# Allegro board LAN9500_TEST_V10A.brd
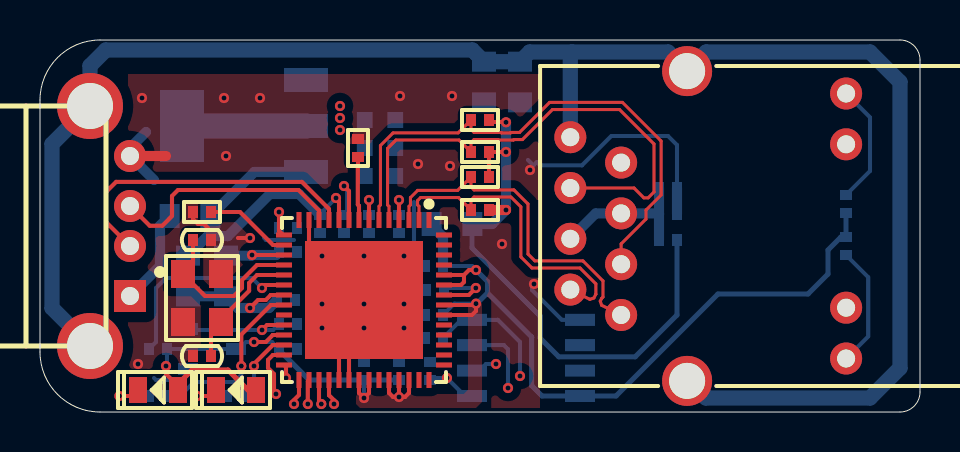
[diagram p0: board, top side]
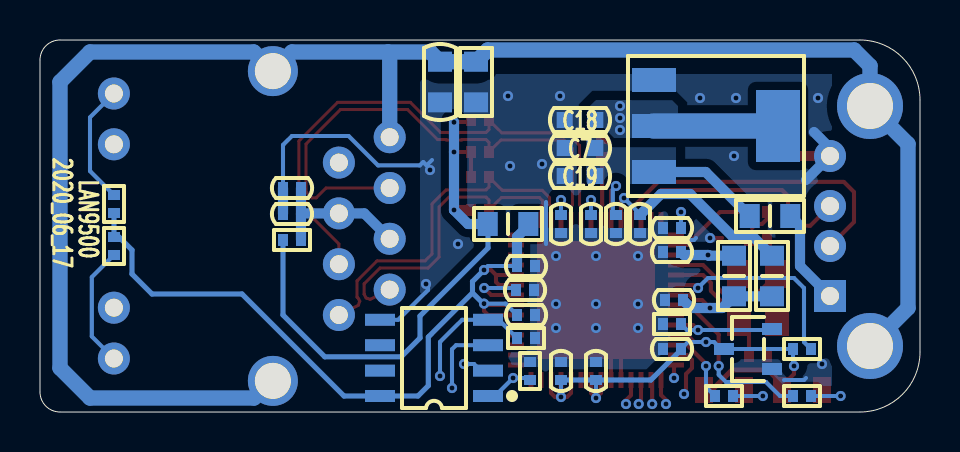
[diagram p1: board, bottom side, seen from below]

Outline 44 x 18.6 mm; copper layers: TOP, L02_GND, L03_VCC, BOTTOM. Coordinates in mm from the lower left corner of the outline.
Outline path: 0,15.6 arc(0.88,17.72) 3,18.6 43,18.6 arc(43.71,18.31) 44,17.6 44,1 arc(43.71,0.29) 43,0 3,0 arc(0.88,0.88) 0,3 0,15.6

## Design rules (mm)
constraint set DEFAULT: min track width 0.203, pair gap 0.203
net group DP1: nets RXN RXP
net group DP2: nets TXN TXP
net group DP3: nets USBDM USBDP

## Placement (name value [footprint] x y rotation side)
C1  0.1uF_50V  [C0402]  31.4 11.2 180 bottom
C2  1nF_50V  [C0402]  31.4 9.9 180 bottom
C4  0.1uF_50V  [C0402]  12.4 3.15 180 bottom
C5  12pF_50V  [C0402]  8.1 8.6 180 top
C6  12pF_50V  [C0402]  8.1 2.8 0 top
C7  10uF_10V  [C0603]  17 13.2 0 bottom
C8  0.1uF_50V  [C0402]  19.75 6.1 0 bottom
C9  0.1uF_50V  [C0402]  12.3 5.6 180 bottom
C10  0.1uF_50V  [C0402]  12.4 8 180 bottom
C11  0.1uF_50V  [C0402]  16.2 2.05 270 bottom
C12  0.1uF_50V  [C0402]  17.95 2.05 270 bottom
C13  0.1uF_50V  [C0402]  19.7 7.3 0 bottom
C14  0.1uF_50V  [C0402]  19.7 4.85 0 bottom
C15  0.1uF_50V  [C0402]  17.95 9.4 90 bottom
C16  0.1uF_50V  [C0402]  16.45 9.4 90 bottom
C17  4.7nF_50V  [C0805]  24 16.5 270 bottom
C18  10uF_10V  [C0603]  17 14.6 0 bottom
C19  10uF_10V  [C0603]  17 11.8 0 bottom
C20  0.1uF_50V  [C0402]  14 9.4 90 bottom
C21  0.1uF_50V  [C0402]  15.2 9.4 90 bottom
C22  0.1uF_50V  [C0402]  12.4 9.2 180 bottom
D1  LED_GREEN  [LED0805]  5.9 1.1 180 top
D2  LED_GREEN  [LED0805]  9.8 1.1 180 top
J1  -  [HR911105A]  35.41 9.3 0 top
J2  -  [USB-A-MALE]  4.7 9.3 180 top
L1  BLM21PG600  [L0805]  7.5 9.8 0 bottom
L2  BLM21PG600  [L0805]  20.6 9.4 0 bottom
L3  BLM21PG600  [L0805]  9.3 6.8 90 bottom
L4  BLM21PG600  [L0805]  7.4 6.8 90 bottom
NOREF  -  []  -0.21 0 0 top
NOREF#2  -  []  0 0 90 top
NOREF#3  -  []  0 0 0 top
R1  49.9R  [R0402]  22 11.75 180 top
R2  49.9R  [R0402]  22 10.1 180 top
R3  49.9R  [R0402]  22 14.6 180 top
R4  49.9R  [R0402]  22 13 180 top
R5  470R  [R0402]  40.3 8.3 90 bottom
R6  0R  [R0402]  31.4 8.6 0 bottom
R8  470R  [R0402]  40.3 10.4 270 bottom
R9  12K  [R0402]  15.9 13.2 270 top
R10  10K/NI  [R0402]  19.7 3.7 180 bottom
R12  100K  [R0402]  12.4 4.4 180 bottom
R13  10K  [R0402]  19.5 2.05 90 bottom
R14  12K  [R0402]  8.1 10 0 top
R15  0R  [R0402]  5.9 3.15 180 bottom
R16  10K  [R0402]  5.9 0.8 0 bottom
R17  10K  [R0402]  9.8 0.8 0 bottom
R18  10M  [R0805]  22.2 16.5 270 bottom
U1  LAN9500AI-ABZJ-TR  [QFN56-8X8X0R5-5R9X5R9]  16.2 5.6 180 top
U2  MAX809SN293D3T1G  [SOT23-3]  8.6 3.15 90 bottom
U3  AT93C46DN-SH-T/NI  [SOIC8]  24.3 2.7 90 bottom
U4  AMS1117-3.3  [SOT223]  10.2 14.3 270 bottom
Y1  X322525MOB4SI  [X-4P-3R2X2R5-SMD]  8.1 5.7 270 top

## Library data of the parts
C1 C2 C4-C22 = CAP NP_2
D1 D2 = LED_4
J1 = CON_RJ45_1X8_F_RA_0
J2 = USB-A-MALE
L1-L4 = IND_BEAD_0805_600OHM_200MA
R1-R6 R8-R10 R12-R18 = R_Generic
U1 = LAN9500AI-ABZJ-TR_0
U2 = MAX809_0
U3 = AT93C46DN-SH-T
U4 = AMS1117-3.3
Y1 = X322525MOB4SI

## Footprints (pads in the part's own frame, mm; a bottom-side part is the same pattern mirrored in y, then rotated)
C0402
  rect 0.5x0.6 smd: 1(-0.45,0) 2(0.45,0)
C0603
  rect 0.8x0.8 smd: 1(-0.762,0) 2(0.762,0)
C0805
  rect 1x1.2 smd: 1(-1.016,0) 2(1.016,0)
HR911105A
  round 1.6 hole 0.9: 1(-6.35,-4.45) 2(-8.89,-3.18) 3(-6.35,-1.91) 4(-8.89,-0.64) 5(-6.35,0.63) 6(-8.89,1.9) 7(-6.35,3.17) 8(-8.89,4.44) 9(4.9,-6.625) 10(4.9,-4.085) 11(4.9,4.085) 12(4.9,6.625)
  round 2.5 hole 1.8: 13(-3.05,-7.745) 14(-3.05,7.745)
L0805
  rect 1x1.2 smd: 1(-1.016,0) 2(1.016,0)
LED0805
  rect 0.9x1.3 smd: 1(-1,0) 2(1,0)
QFN56-8X8X0R5-5R9X5R9
  rect 0.25x0.8 smd: 1(-3.25,-4) 2(-2.75,-4) 3(-2.25,-4) 4(-1.75,-4) 5(-1.25,-4) 6(-0.75,-4) 7(-0.25,-4) 8(0.25,-4) 9(0.75,-4) 10(1.25,-4) 11(1.75,-4) 12(2.25,-4) 13(2.75,-4) 14(3.25,-4) 29(3.25,4) 30(2.75,4) 31(2.25,4) 32(1.75,4) 33(1.25,4) 34(0.75,4) 35(0.25,4) 36(-0.25,4) 37(-0.75,4) 38(-1.25,4) 39(-1.75,4) 40(-2.25,4) 41(-2.75,4) 42(-3.25,4)
  rect 0.8x0.25 smd: 15(4,-3.25) 16(4,-2.75) 17(4,-2.25) 18(4,-1.75) 19(4,-1.25) 20(4,-0.75) 21(4,-0.25) 22(4,0.25) 23(4,0.75) 24(4,1.25) 25(4,1.75) 26(4,2.25) 27(4,2.75) 28(4,3.25) 43(-4,3.25) 44(-4,2.75) 45(-4,2.25) 46(-4,1.75) 47(-4,1.25) 48(-4,0.75) 49(-4,0.25) 50(-4,-0.25) 51(-4,-0.75) 52(-4,-1.25) 53(-4,-1.75) 54(-4,-2.25) 55(-4,-2.75) 56(-4,-3.25)
  rect 5.9x5.9 smd: 57(0,0)
R0402
  rect 0.5x0.6 smd: 1(-0.45,0) 2(0.45,0)
R0805
  rect 1x1.2 smd: 1(-1.016,0) 2(1.016,0)
SOIC8
  rect 0.6x1.5 smd: 1(-1.9,-2.7) 2(-0.63,-2.7) 3(0.64,-2.7) 4(1.91,-2.7) 5(1.91,2.7) 6(0.64,2.7) 7(-0.63,2.7) 8(-1.9,2.7)
SOT23-3
  rect 0.6x1 smd: 1(-1,-1.2) 2(1,-1.2) 3(0,1.2)
SOT223
  rect 1.2x2.2 smd: 1(-2.3,-3.1) 2(0,-3.1) 3(2.3,-3.1)
  rect 3.6x2.2 smd: 4(0,3.1)
USB-A-MALE
  rect 1.6x1.6 hole 0.9: 1(0.2,3.5)
  round 1.6 hole 0.9: 2(0.2,1) 3(0.2,-1) 4(0.2,-3.5)
  round 3.3 hole 2.3: 5(2.2,6) 6(2.2,-6)
X-4P-3R2X2R5-SMD
  rect 1.4x1.2 smd: 1(-1.2,-0.95) 2(1.2,-0.95) 3(1.2,0.95) 4(-1.2,0.95)

## Nets
GND: C1.1 C2.1 C4.1 C5.1 C6.1 C7.2 C8.1 C9.1 C10.1 C11.1 C12.1 C13.1 C14.1 C15.1 C16.1 C17.2 C18.2 C19.2 C20.1 C21.1 C22.1 J2.4 R9.1 R10.2 R12.1 R13.2 R14.1 R18.2 U1.13 U1.33 U1.34 U1.57 U2.1 U3.5 U4.1 Y1.2 Y1.4
GND_EARTH: C17.1 J1.8 J1.13 J1.14 J2.5 J2.6 R18.1
VBUS_DET: R15.2 U1.20
VCC-USB: J2.1(VBUS) L1.1
VCC_3V3: C4.2 C11.2 C12.2 C13.2 C14.2 C18.1 D1.1 D2.1 L2.1 R5.2 R8.2 R15.1 U1.25 U1.35 U1.36 U1.38 U1.39 U1.40 U1.48 U1.49 U1.51 U1.52 U2.3(VCC) U3.8(VCC) U4.2 U4.4(OUT_2)
VCC_5V: C7.1 C19.1 L1.2(B) U4.3
VDD33A: C15.2 C16.2 C21.2 C22.2 L2.2(B) R1.1 R2.1 R3.1 R4.1 R6.2 U1.4 U1.7 U1.9 U1.15
VDD_CORE: C8.2 C9.2 L3.1 L4.1 U1.21 U1.50
VDDPLL: C20.2 L4.2(B) U1.10
VDDUSBPLL: C10.2 L3.2(B) U1.17
EECLK/PWR_SEL: U1.29 U3.2
EECS: R13.1 U1.30 U3.1
EEDI: U1.32 U3.3
EEDO/AUTOMDIX_EN: R10.1 U1.31 U3.4
NFDX_LED/GPIO8: R17.2 U1.26
NLNKA_LED/GPIO9: J1.10 U1.27
NRESET: R12.2 U1.24 U2.2
NSPD_LED/GPIO10: J1.11 U1.28
RXN: J1.6 R4.2 U1.5
RXP: J1.3 R3.2 U1.6
TXN: J1.2 R2.2 U1.2
TXP: J1.1(TXP1) R1.2 U1.3
USBDM: J2.2 U1.11
USBDP: J2.3 U1.12
XI: C5.2 U1.18 Y1.1
XO: C6.2 U1.19(XO) Y1.3(X2)
N16792268: R9.2 U1.8
N16792367: R14.2 U1.16
N16793057: D1.2(CATHODE) R16.1
N16793060: R16.2 U1.22
N16797773: D2.2(CATHODE) R17.1
N16921144: C1.2 C2.2 J1.4 J1.5 R6.1
N16923033: J1.9 R5.1
N16923631: J1.12 R8.1

Pads without a net: J1 7; U1 1 14 23 37 41 42 43 44 45 46 47 53 54 55 56; U3 6 7

## Via types
v1: diameter 0.508, hole 0.254, TOP to BOTTOM, 58 vias

## Routing (per net, layer and track width the routed paths; a pad name or vN(x,y) marks a point on that pad's centre or on a via; arc(x,y) is an arc through that point)
GND: length 41.7
  TOP w0.203: 9.9,8.7 v1(10.5,8.7) ; 8.4,9.2 8.2,9.4 7.9,9.4 7.65,9.65 R14.1 ; 15.45,4.85 U1.57 13.45,8.35 U1.13 ; 15.45,4.85 U1.34 ; 15.45,4.85 14.95,4.35 U1.33
  TOP w0.508: J2.4 6.3,12.8
  L02_GND w0.508: 6.1,12.3 5.6,12.8 J2.4
  BOTTOM w0.203: 18.7,10.5 18.7,8.4 ; 12.7,8.6 11.3,8.6 11.2,8.7 ; 6.8,1.6 5.8,1.6 5.7,1.7 ; 24.4,12.6 24.67,12.33 24.84,12.5 25.01,12.33 27.1,12.33 28.57,13.8 31.4,13.8 31.85,13.35 C1.1 ; v1(24.7,6.4) 24.6,6.3 24.6,6.1 26.09,4.61 U3.5
  BOTTOM w0.508: C2.1 C1.1 ; 5.3,14 4.5,13.2 J2.4 5.7,11.6
  vias: v1(4.9,2.4) v1(5.1,15.7) v1(9.2,15.7) v1(9.3,12.8) v1(11,15.7) v1(14.1,7.8) v1(14.1,5.4) v1(14.1,4.2) v1(16.2,7.8) v1(16.2,5.4) v1(16.2,4.2) v1(18,15.8) v1(18.2,7.8) v1(18.2,5.4) v1(18.2,4.2) v1(18.9,12.4) v1(20.5,12.3) v1(20.6,15.8) v1(23.1,8.4) v1(24.5,12.1)
GND_EARTH: length 88.5
  BOTTOM w0.762: J2.5 0.6,5.2 0.6,13.4 J2.6 2.5,17.31 3.29,18.1 21.62,18.1 R18.1 C17.1 24.48,18 26.6,18 ; 26.6,18 26.52,17.92 J1.8 ; 26.6,18 31.4,18 J1.14 33.31,18 41.5,18 43,16.5 43,2.2 41.5,0.7 33.3,0.7 32.45,1.55 J1.13
VBUS_DET: length 10.1
  TOP w0.203: U1.20 11.25,6.35 v1(11.1,6.2)
  BOTTOM w0.203: v1(11.1,6.2) 10.6,6.7 6.3,6.7 5.8,6.2 5.8,3.5 R15.2
VCC-USB: length 4.8
  BOTTOM w0.508: J2.1 6,7.3 6,9.32 L1.1
VCC_3V3: length 76.1
  TOP w0.203: v1(17.95,0.75) 18.25,0.75 18.45,0.95 U1.40 ; v1(17.95,0.75) 17.65,0.75 17.45,0.95 U1.38 ; v1(17.95,0.75) U1.39 ; v1(10.7,3.5) 11.29,3.5 11.64,3.85 U1.25 ; 21.8,5.4 21.75,5.35 U1.49 ; 21.8,5.4 21.8,5.05 21.6,4.85 U1.48 ; 21.8,5.4 v1(21.8,5.42) ; U1.51 21.05,6.35 21.2,6.5 21.2,6.85 ; 21.2,6.85 U1.52 ; 21.2,6.85 21.45,7.1 v1(21.8,7.1) ; v1(6.3,2.3) 6.3,1.9 6.8,1.4 6.9,1.4 ; U1.35 15.95,0.95 v1(16.2,0.7) 16.45,0.95 U1.36
  TOP w0.254: D2.1 10.4,1.1 9.4,2.1 7.6,2.1 6.9,1.4 D1.1
  BOTTOM w0.203: v1(21.8,7.1) 21.6,7.3 C13.2 ; C4.2 11.6,3.5 v1(10.7,3.5) 10.3,3.5 9.95,3.15 U2.3 R15.1 6.35,2.35 v1(6.3,2.3) ; C11.2 v1(16.2,0.7) ; C14.2 20.72,5.42 v1(21.8,5.42) ; v1(17.95,0.75) U1.39
  BOTTOM w0.254: R8.2 R5.2 40.05,8.75 39.4,8.1 39.4,6.9 38.4,5.9 33.9,5.9 28.8,0.8 U3.8 25.1,0.8 24.58,1.32 24.58,3.75 22.38,5.96 ; C4.2 11.95,3.1 13.45,1.6 C11.2 U1.39 ; v1(21.8,7.1) 22.38,6.52 22.38,5.96 ; 22.38,5.96 21.84,5.42 v1(21.8,5.42)
  BOTTOM w0.508: L2.1 19.58,9.32 20.15,8.75 C13.2
  BOTTOM w1.27: U4.2 U4.4
  vias: v1(15,15.3) v1(15,14.7) v1(15,14.1)
VCC_5V: length 5.7
  BOTTOM w0.508: U4.3 10.72,12 L1.2
VDD33A: length 50.5
  TOP w0.203: v1(23.3,14.49) 23.29,14.5 22.55,14.5 R3.1 ; U1.15 12.15,8.85 11.95,9.05 v1(11.95,10) ; U1.4 v1(17.95,10.6) ; U1.7 v1(16.45,10.6) ; R1.1 R4.1 v1(23.3,13) ; U1.9 15.45,11.05 v1(15.2,11.3)
  TOP w0.508: R2.1 v1(23.3,10.1)
  L03_VCC w0.203: v1(15.2,11.3) 13.25,11.3 v1(11.95,10)
  L03_VCC w0.508: v1(23.3,10.1) 22.8,10.6 v1(17.95,10.6) v1(16.45,10.6) 15.75,11.3 v1(15.2,11.3)
  BOTTOM w0.203: v1(11.95,10) C22.2 ; v1(17.95,10.6) C15.2 ; C21.2 15.36,10.01 15.36,11.14 v1(15.2,11.3) ; v1(16.45,10.6) C16.2
  BOTTOM w0.254: R6.2 31.85,4.85 29.76,2.76 25.94,2.76 25,3.7 25,4.8 21.6,8.2 21.6,9.38 L2.2
  BOTTOM w0.508: v1(23.3,14.49) v1(23.3,13) v1(23.3,10.1) 22.6,9.4 L2.2
VDD_CORE: length 21.9
  TOP w0.203: v1(10.5,5.2) 10.9,5.6 11.29,5.6 11.54,5.85 U1.21 ; v1(21.79,6.2) 21.44,5.85 U1.50
  L03_VCC w0.508: v1(10.5,5.2) 11.5,5.2 12.5,6.2 v1(21.79,6.2)
  BOTTOM w0.203: v1(21.79,6.2) 20.3,6.2 C8.2
  BOTTOM w0.508: C9.2 11.45,5.2 v1(10.5,5.2) 9.88,5.2 L3.1 L4.1
VDDPLL: length 10.7
  TOP w0.203: U1.10 14.95,10.55 v1(14.8,10.7)
  BOTTOM w0.203: C20.2 14,9.9 v1(14.8,10.7)
  BOTTOM w0.508: C20.2 12.95,10.9 11.49,10.9 9.39,8.79 8.38,8.79 L4.2
VDDUSBPLL: length 4.3
  TOP w0.203: U1.17 v1(10.6,7.85)
  BOTTOM w0.508: L3.2 10.57,7.82 v1(10.6,7.85) 11.8,7.85 C10.2
EECLK/PWR_SEL: length 13.8
  TOP w0.203: U1.29 12.95,0.85 12.7,0.6 v1(12.7,0.4)
  L03_VCC w0.203: v1(22.8,2.4) 22.6,2.6 14.8,2.6 12.7,0.5 v1(12.7,0.4)
  BOTTOM w0.203: v1(22.8,2.4) 22.3,2.4 21.97,2.07 U3.2
EECS: length 11.7
  TOP w0.203: U1.30 13.39,1.54 v1(13.39,0.4)
  L03_VCC w0.203: v1(13.39,0.4) 13.39,0.52 15.07,2.2 19.85,2.2 v1(20.35,1.7)
  BOTTOM w0.203: U3.1 21.25,0.8 v1(20.35,1.7) 19.6,1.7 R13.1
EEDI: length 14.7
  TOP w0.203: v1(14.7,0.4) 14.7,0.59 14.45,0.84 U1.32
  L03_VCC w0.203: v1(14.7,0.4) 15.7,1.4 19.2,1.4 19.9,0.7 21.1,0.7 21.6,1.2 v1(23.4,1.2)
  BOTTOM w0.203: U3.3 23.2,3.34 23.4,3.14 v1(23.4,1.2)
EEDO/AUTOMDIX_EN: length 18.8
  TOP w0.203: v1(14.06,0.4) 14.06,0.43 13.95,0.55 U1.31
  L03_VCC w0.203: v1(14.06,0.4) 14.06,0.56 15.31,1.8 19.46,1.8 20.12,1.14 20.84,1.14 21.5,1.8 v1(24,1.8)
  BOTTOM w0.203: R10.1 21.06,4.61 U3.4 22.89,4.61 24,3.5 v1(24,1.8)
NFDX_LED/GPIO8: length 3.7
  TOP w0.203: v1(10.7,2.3) 10.7,2.41 11.64,3.35 U1.26
  BOTTOM w0.203: v1(10.7,2.3) 10.7,1.25 R17.2
NLNKA_LED/GPIO9: length 33.5
  TOP w0.203: v1(11.8,0.9) 11.7,1 11.7,1.9 11.4,2.2 11.4,2.6 11.65,2.85 U1.27
  L03_VCC w0.203: J1.10 39.82,5.7 33.4,5.7 30.7,3 14.39,3 12.29,0.9 v1(11.8,0.9)
NRESET: length 5.9
  TOP w0.203: U1.24 11.35,4.35 v1(11.1,4.1)
  BOTTOM w0.203: R12.2 11.65,4.1 v1(11.1,4.1) 7.45,4.1 U2.2
NSPD_LED/GPIO10: length 33.5
  TOP w0.203: v1(12.3,1.7) 12.3,2.25 U1.28
  L03_VCC w0.203: 40.31,13.38 30.42,3.5 14.1,3.5 v1(12.3,1.7)
RXN: length 26.2
  TOP w0.152: U1.5 17.45,10.28 17.38,10.36 17.38,13.18 17.8,13.6 20.95,13.6 R4.2 21.55,13.47 21.7,13.62 22.91,13.62 22.93,13.6 23.67,13.6 23.69,13.62 24.12,13.62 25.62,15.12 28.98,15.12 30.7,13.4 30.7,11 30.41,10.71 30.19,10.71 29.7,11.2 J1.6
RXP: length 27.3
  TOP w0.152: U1.6 16.95,10.28 17.02,10.36 17.02,13.33 17.65,13.96 20.91,13.96 R3.2 21.55,14.13 21.7,13.98 23.05,13.98 23.08,13.95 23.52,13.95 23.55,13.98 23.97,13.98 25.48,15.48 29.12,15.48 31.06,13.55 31.06,10.85 30.3,10.1 30.3,9.65 29.06,8.4 J1.3
TXN: length 16.1
  TOP w0.152: U1.2 18.95,10.28 18.88,10.36 18.88,10.57 19.03,10.72 20.93,10.72 R2.2 21.55,10.59 21.7,10.75 23.55,10.75 24.04,10.25 24.04,7.75 24.6,7.2 27,7.2 27.79,6.41 27.79,5.89 27.7,5.7 27.49,5.63 J1.2
TXP: length 17.5
  TOP w0.152: J1.1 28.08,5.34 28.01,5.54 28.08,5.68 28.15,5.75 28.15,6.56 27.15,7.56 24.74,7.56 24.4,7.9 24.4,10.4 23.7,11.1 21.7,11.1 21.55,11.26 R1.2 20.88,11.08 18.88,11.08 18.52,10.72 18.52,10.36 18.45,10.28 U1.3
USBDM: length 15.7
  TOP w0.203: U1.11 14.45,10.15 13.09,11.51 3.81,11.51 3.3,11 3.3,9.5 J2.2
USBDP: length 12.1
  TOP w0.203: U1.12 13.95,10.08 12.93,11.1 6.9,11.1 6.6,10.8 6.6,9.8 6.11,9.31 5.49,9.31 J2.3
XI: length 8.3
  TOP w0.203: U1.18 10.85,7.35 10.1,6.6 10.1,6.2 9.7,5.8 8.25,5.8 Y1.1 7.65,7.4 C5.2
XO: length 6.4
  TOP w0.203: U1.19 10.85,6.85 10.46,6.45 10.46,6.06 9.05,4.65 Y1.3 8.55,4 C6.2
N16792268: length 3.2
  TOP w0.203: U1.8 15.95,10.31 15.89,10.37 15.89,12.26 15.9,12.27 R9.2
N16792367: length 4.3
  TOP w0.203: R14.2 10,10 11.65,8.35 U1.16
N16793057: length 2.6
  TOP w0.203: D1.2 4.9,1 4.7,0.8 v1(3.97,0.8)
  BOTTOM w0.203: v1(3.97,0.8) R16.1
N16793060: length 8.9
  TOP w0.203: U1.22 11.54,5.35 10.06,3.87 v1(10.06,2.3)
  BOTTOM w0.203: v1(10.06,2.3) 10.06,1.86 9.7,1.5 7.7,1.5 7,0.8 R16.2
N16797773: length 2.6
  TOP w0.203: D2.2 8.5,0.8 v1(7.86,0.8)
  BOTTOM w0.203: v1(7.86,0.8) R17.1
N16921144: length 7.6
  BOTTOM w0.508: J1.4 27.79,9.93 J1.5 30.92,9.93 C2.2 ; C2.2 C1.2 ; C2.2 R6.1
N16923033: length 6.1
  BOTTOM w0.203: R5.1 41.41,6.74 41.41,3.78 J1.9
N16923631: length 6.1
  BOTTOM w0.203: J1.12 41.5,14.73 41.5,12.05 R8.1

## Copper pours and planes (outline as drawn; the poured copper is in the pictures)
GND on TOP: 4.4,16.9 4.4,0.2 25,0.2 25,16.9 ; 2 cut-outs
GND on BOTTOM: 4.4,16.9 4.4,0.2 25,0.2 25,16.9 ; 4 cut-outs
GND on L02_GND: 4.4,16.9 4.4,0.2 25,0.2 25,16.9
VCC_3V3 on TOP: 15.9,0.9 21.2,0.9 21.4,1.1 21.4,5.4 21.6,5.6 21.9,5.6 22.1,5.4 22.1,0.5 21.8,0.2 16,0.2 15.8,0.4 15.8,0.8
VCC_3V3 on BOTTOM: 12.1,13.8 12.1,15.3 12.4,15.6 16.2,15.6 16.6,15.2 16.6,14.2 15.8,14.2 15.3,13.7 12.2,13.7
VCC_3V3 on L03_VCC: 4.4,16.9 4.4,0.2 25,0.2 25,16.9 ; 3 cut-outs
VCC_5V on BOTTOM: 12.2,11.4 12.2,13.3 12.3,13.4 15.5,13.4 15.8,13.7 16.7,13.7 16.7,11.5 16.6,11.4

## Text on the board
Ref Des/Silkscreen Bottom: LAN9500 | 2020_06_17
DISPLAY_BOTTOM: SCALE: NONE | If the angle of PCB board outline is circular,please use this kind of break out area | If not use it,please delete it before you gerber out | If the angle of PCB board outline is right angle,please use this kind of break out area | AS usual,please use the 0.8MM stamp Via | A_TARGET:1.53 mm | ___ PUBI (PUBLIC INFORMATION) | ___ FIUO (HY INTERNAL USE ONLY) | ___ FCP (HY CONFIDENTIAL PROPRIETARY) | THIS DOCUMENT CONTAINS INFORMATION | PROPRIETARY TO FREESCALE AND SHALL | NOT BE USED FOR ENGINEERING DESIGN | PROCUREMENT OR MANUFACTURE IN WHOLE | OR IN PART WITHOUT THE CONSENT OF | NXP. | 1. THIS DRAWING SPECIFIES THE REQUIREMENTS FOR A | 2. THE PWB MUST BE LEAD FREE ASSEMBLY PROCESS COMPATIBLE AND MUST BE ABLE TO HANDLE | 3. BASE MATERIAL - LAMINATE AND PREPREG SHALL MEET IPC-4101B-26, 83 or 98 | Tg - MUST BE GREATER THAN OR EQUAL TO 150 DEGREES CELSIUS. | Td - MUST BE GREATER THAN OR EQUAL TO 330 DEGREES CELSIUS. | 4. COPPER FOIL WEIGHT - SEE STACKUP DETAIL 'A' | 5. CHARACTERISTIC IMPEDANCE - SEE DETAIL 'B' | 6. MINIMUM CONDUCTIVE WIDTH/SPACING TO BE .00X"/.00X" | 7. PLATING FINISH - BOTH SIDES ENIG (ELECTROLESS NICKEL IMMERSION GOLD): | 8. ALL THROUGH HOLE VIAS MAY BE PLATED SHUT. | - MUST BE UL RECOGNIZED AND MUST HAVE AN ID THAT CONFORMS TO UL94V-0 | 9. SOLDERMASK - GREEN COLOR (TAIYO OR EQUIVALENT), BOTH SIDES. | 10. SILKSCREEN - WHITE EPOXY INK, BOTH SIDES.  NO SILK ON PADS. | 11. ELECTRICAL TEST - 100% IPCD356. | 12. PRINTED WIRING BOARD IS TO BE INDIVIDUALLY BAGGED. | 13. DRC'S MUST BE RUN ON THE GERBER BEFORE BUILDING BOARDS, | UNLESS PRIOR APPROVAL IS GIVEN IN WRITING BY FREESCALE. | 14. ADD TEARDROPS TO ALL SIGNAL LAYERS. | 15. SOLDER SAMPLES TO BE PROVIDED. | 16. BASIC GRID INCREMENT AT 1:1 IS .0001. | 17. SUPPLIER MARKINGS - ON SOLDER SIDE ONLY, WHERE SHOWN. | MODIFICATION OF SOLDERMASK IS NOT ALLOWED WITHOUT WRITTEN PERMISSION FROM FREESCALE. | WITH SPECIFICATION IPC-A-600 CLASS 2 (LATEST REVISION). | A MINIMUM OF 5 CYCLES AT 260 DEGREES CELSIUS FOR 10 SECONDS. | 18. THE PWB WILL BE MARKED AS LEAD FREE BY USE OF AN INK STAMP Pb | 19. THE PWB WILL BE MARKED AS LEAD FREE PROCESS COMPATIBLE BY USE OF AN INK STAMP 260 C | 21. FINISHED PCB MUST BE PANELIZED FOR ASSEMBLY ACCORDING TO CONTRACT MANUFACTURING REQUIREMENT. | ADDITION OF .25" RAILS AND .125" NON-PLATED TOOLING HOLES ARE AT THE DISCRETION | OF CONTRACT MANUFACTURER AND FAB HOUSE. | PANELIZATION MUST BE APPROVED BY FREESCALE. | 2.540-6.350 MICRON (100-250 MICROINCH) OF NICKEL. | .05080-.232 MICRON (2-8 MICROINCH) OF GOLD OVER | PRINTED WIRING BOARD IN ACCORDANCE | NO.2, XinYe Road, West High-Tech Zone, ChengDu, Sichuan | 20. ALL PLATED AND NON-PLATED THROUGH HOLES ARE TO BE DRILLED AT PRIMARY DRILL STEP. | ALL HOLE LOCATION TOLERANCES ARE TO BE +/-.002 IN REFERENCE TO THE PRIMARY DATUM. | X | XXXLZJXXX | V10A | 18-10-01 | JLC:  1.6mm THK +/- 10% | LAYER 1  TOP SIDE          1oz+plating | LAYER 2  BOTTOM SIDE       1oz+plating | FINISHED Cu WEIGHT | NO-***** | 1/1 | CAD-***** | 1 | DETAIL A | LAYER STACKUP | DETAIL B | IMPEDANCE REQUIREMENTS | IMPEDANCE TOLERANCE IS 10% | LAN9500_TEST_V10A | FAB-***** | A2 | HYOC
COMPVAL_TYPE_TOP: FIGURE | FINISHED_SIZE | 0.254 | 0.9 | 1.8 | 2.3 | DRILL CHART: TOP to BOTTOM | ALL UNITS ARE IN MILLIMETERS | PLATED | QTY | 58 | 16 | 2 | 78 | TOTAL HOLES:
